# EAGLE board datalogger-v20 (EAGLE 7.7.0)
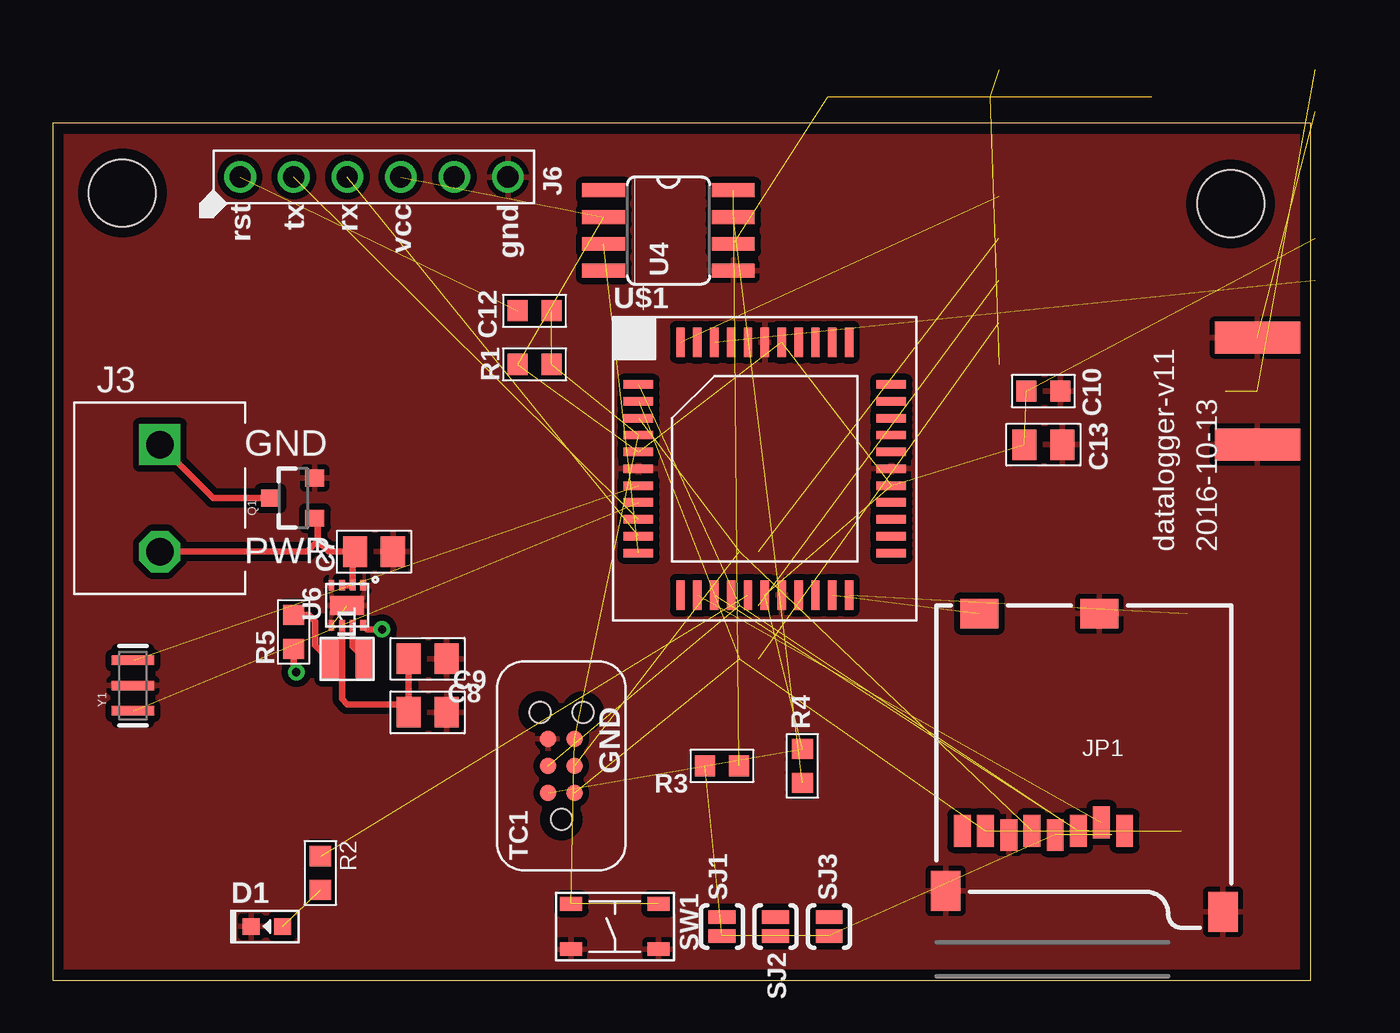
[diagram p0: board, top side]
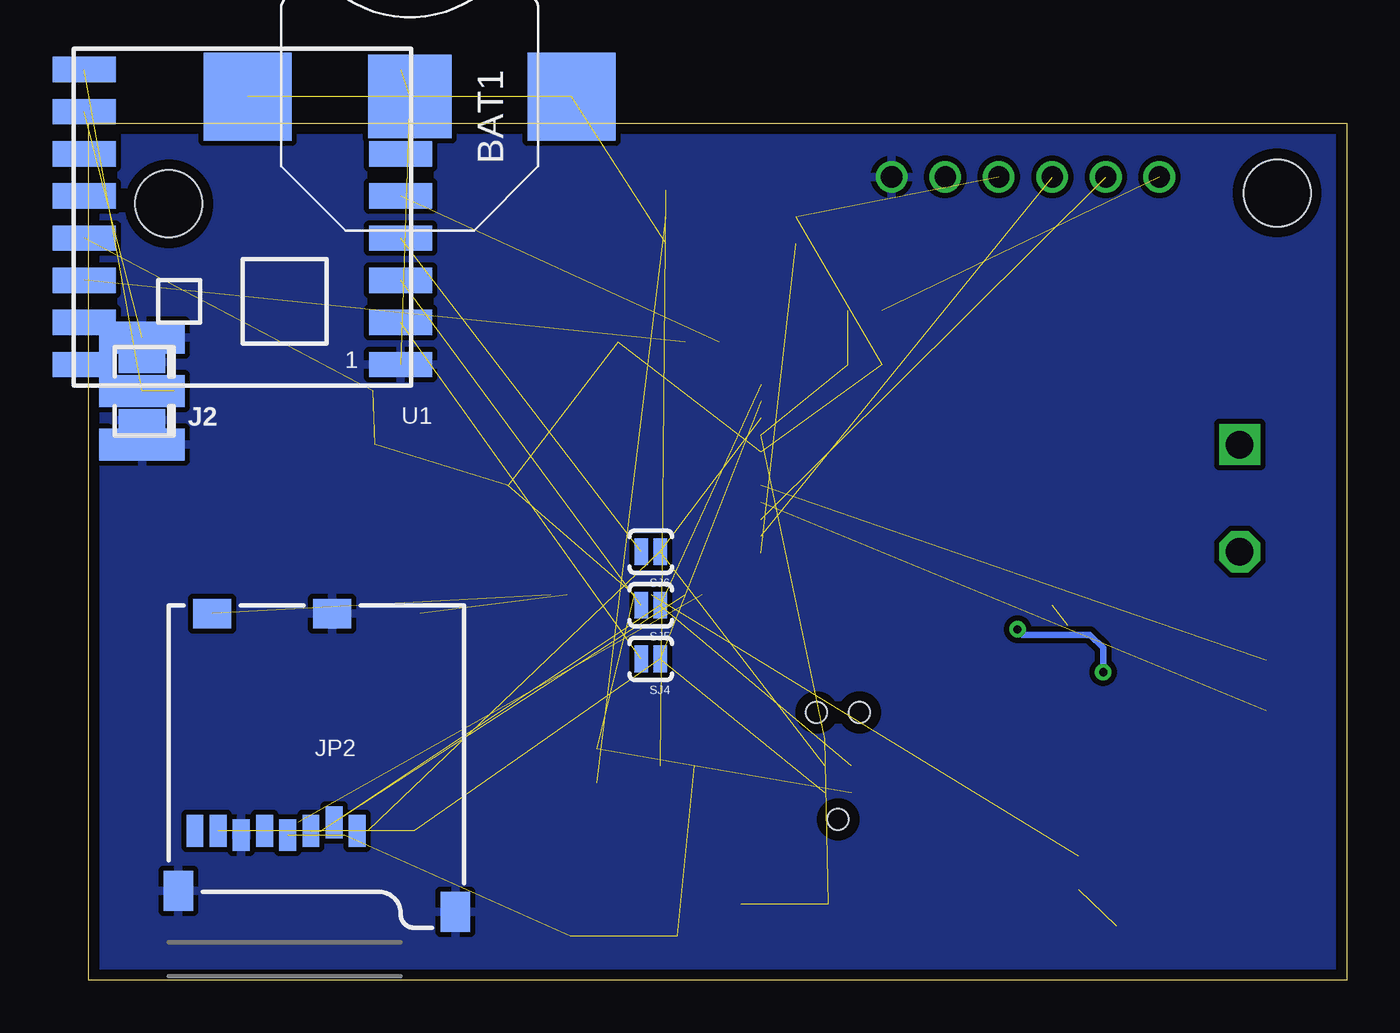
[diagram p1: board, bottom side, seen from below]

Size 59.69 x 40.64 mm. Coordinates in mm from the lower left corner, seen from the top.
Outline: 0,0 59.69,0 59.69,40.64 0,40.64 0,0
Copper layers (1*16): Top 0.0178mm / dielectric 59mil / Bottom 0.0178mm
Design rules "SSC-EAGLE-2Lyr_v1.0.0.3": minimum track width 6mil, minimum drill 14mil, track to track 6mil, track to pad 6mil, pad to pad 6mil, via to via 6mil, smd to smd 6mil, copper to edge 20mil, drill to drill 16mil, minimum pad ring 8mil, minimum via ring 8mil, stop-mask expansion 3mil, vias tented up to drill 0mil, thermal gap 10mil
Net classes: 1 power: width 0.381 mm, clearance 0.254 mm
Holes 3.17 mm at 3.3,37.34 55.88,36.83

## Footprints (pad centres in the part's own frame; a part is rotated, then mirrored left to right if it is on the bottom)
BAT_12MM = smd 3.962 x 3.962: GND 0,0 | smd 4.17 x 4.17: PWR@1 -7.685,0; PWR@2 7.685,0
C0805-N = smd 1.15 x 1.45: 1 -0.9,0; 2 0.9,0
C0603-N = smd 0.95 x 1: 1 -0.8,0; 2 0.8,0
LED0603 = smd 0.8 x 0.8: ANODE 0.75,0; CATHODE -0.75,0
ADAFRUIT_U.FL = smd 2.2 x 1.05: 1 0,1.375; 2 0,-1.375 | smd 0.8 x 1: 3 1.525,0
SCREW_TERM_2POS = drill 1.3 square: GND -2.54,0 | drill 1.3 octagon: PWR 2.54,0
SMA-EDGE = smd 1.524 x 4.064: GND@0 0,0; GND@1 5.08,0; SIG 2.54,0 | smd 1.524 x 4.064 bottom: GND@2 0,0; GND@3 5.08,0
PTH_2.54MM_01X06 = drill 1: P$1 -6.35,0; P$2 -3.81,0; P$3 -1.27,0; P$4 1.27,0; P$5 3.81,0; P$6 6.35,0
MICRO-SD-SOCKET-SDIO = smd 1.8 x 1.4: CD 11.92,0.4; GND2 6.22,0.4 | smd 0.8 x 1.5: CD/DAT3 6.13,10.3; CLK 9.43,10.7; CMD 7.23,10.7; DAT0 11.63,10.7; DAT1 12.73,10.7; DAT2 5.03,10.7; GND 10.53,10.9; VCC 8.33,10.9 | smd 1.4 x 1.9: GND1 0.37,14.55; GND3 13.52,13.55
L2520 = smd 0.85 x 2: P$1 -0.825,0; P$2 0.825,0
SOT23-3 = smd 0.8 x 0.9: 1 -0.95,-1; 2 0.95,-1; 3 0,1.1
R0603-N = smd 0.95 x 1: 1 -0.8,0; 2 0.8,0
PAD-JUMPER-2-NO_YES_SILK = smd 0.635 x 1.27: 1 -0.45,0; 2 0.45,0
TACT4.2MM = smd 1.05 x 0.65: P$1 -2.075,1.075; P$2 2.075,1.075; P$3 -2.075,-1.075; P$4 2.075,-1.075
TC2030-IDC-NL = smd 0.787 x 0.787: P$1 -1.27,-0.635; P$2 -1.27,0.635; P$3 0,-0.635; P$4 0,0.635; P$5 1.27,-0.635; P$6 1.27,0.635 | hole 0.991: 2.54,1.016; 2.54,-1.016; -2.54,0
RFM69HCW-XXXS2 = smd 3 x 1.2: 1 -7.5,7; 2 -7.5,5; 3 -7.5,3; 4 -7.5,1; 5 -7.5,-1; 6 -7.5,-3; 7 -7.5,-5; 8 -7.5,-7; 9 7.5,-7; 10 7.5,-5; 11 7.5,-3; 12 7.5,-1; 13 7.5,1; 14 7.5,3; 15 7.5,5; 16 7.5,7
SO08 = smd 0.66 x 2.032: 1 -1.905,-3.073; 2 -0.635,-3.073; 3 0.635,-3.073; 4 1.905,-3.073; 5 1.905,3.073; 6 0.635,3.073; 7 -0.635,3.073; 8 -1.905,3.073
WSON-8 = smd 0.28 x 0.5: 1 -0.75,-0.95; 2 -0.25,-0.95; 3 0.25,-0.95; 4 0.75,-0.95; 5 0.75,0.95; 6 0.25,0.95; 7 -0.25,0.95; 8 -0.75,0.95 | smd 1.6 x 0.9: P$9 0,0
TQFP44 = smd 1.4 x 0.4: 1 -6,4; 2 -6,3.2; 3 -6,2.4; 4 -6,1.6; 5 -6,0.8; 6 -6,0; 7 -6,-0.8; 8 -6,-1.6; 9 -6,-2.4; 10 -6,-3.2; 11 -6,-4; 23 6,-4; 24 6,-3.2; 25 6,-2.4; 26 6,-1.6; 27 6,-0.8; 28 6,0; 29 6,0.8; 30 6,1.6; 31 6,2.4; 32 6,3.2; 33 6,4 | smd 0.4 x 1.4: 12 -4,-6; 13 -3.2,-6; 14 -2.4,-6; 15 -1.6,-6; 16 -0.8,-6; 17 0,-6; 18 0.8,-6; 19 1.6,-6; 20 2.4,-6; 21 3.2,-6; 22 4,-6; 34 4,6; 35 3.2,6; 36 2.4,6; 37 1.6,6; 38 0.8,6; 39 0,6; 40 -0.8,6; 41 -1.6,6; 42 -2.4,6; 43 -3.2,6; 44 -4,6
RESONATOR-SMD = smd 0.45 x 2: 1 -1.2,0; 2 0,0; 3 1.2,0

## Placement (x,y rotation side)
BAT1  BATTERY_HOLDER12MM  [BAT_12MM]  44.45,41.91 0 bottom
C7  10uF  [C0805-N]  15.24,20.32 0 top
C8  10uF  [C0805-N]  17.78,15.24 0 top
C9  10uF  [C0805-N]  17.78,12.7 0 top
C10  10uF  [C0805-N]  46.99,25.4 0 top
C12  0.1uF  [C0603-N]  22.86,31.75 0 top
C13  0.1uF  [C0603-N]  46.99,27.94 0 top
D1  MF-LED-0603-RED  [LED0603]  10.16,2.54 0 top
FRAME1  FRAME-LETTERNO_PACKAGE  [DUMMY]  0,-1.27 0 top
FRAME3  FRAME-LETTERNO_PACKAGE  [DUMMY]  1.27,-1.27 0 top
J2  U.FL  [ADAFRUIT_U.FL]  57.15,27.94 0 bottom
J3  CON_01X02SCREW_0.2"  [SCREW_TERM_2POS]  5.08,22.86 270 top
J4  ANTENNA_SMA_EDGE  [SMA-EDGE]  57.15,30.48 270 bottom
J6  MF-CON-2.54mm-01x06  [PTH_2.54MM_01X06]  15.24,38.1 0 top
JP1  SD_USD-SOCKET  [MICRO-SD-SOCKET-SDIO]  55.88,17.78 180 top
JP2  SD_USD-SOCKET  [MICRO-SD-SOCKET-SDIO]  41.91,17.78 180 bottom
L1  2.2uH  [L2520]  13.97,15.24 180 top
Q1  mfet-n  [SOT23-3]  11.43,22.86 90 top
R1  10k  [R0603-N]  22.86,29.21 0 top
R2  680  [R0603-N]  12.7,5.08 270 top
R3  10k  [R0603-N]  31.75,10.16 180 top
R4  10k  [R0603-N]  35.56,10.16 90 top
R5  100k  [R0603-N]  11.43,16.51 90 top
SJ1  [PAD-JUMPER-2-NO_YES_SILK]  31.75,2.54 90 top
SJ2  [PAD-JUMPER-2-NO_YES_SILK]  34.29,2.54 90 top
SJ3  [PAD-JUMPER-2-NO_YES_SILK]  36.83,2.54 90 top
SJ4  [PAD-JUMPER-2-NO_YES_SILK]  33.02,15.24 180 bottom
SJ5  [PAD-JUMPER-2-NO_YES_SILK]  33.02,17.78 180 bottom
SJ6  [PAD-JUMPER-2-NO_YES_SILK]  33.02,20.32 180 bottom
SW1  MF-SW-TACT-4.2MM  [TACT4.2MM]  26.67,2.54 0 top
TC1  TC2030-IDC-NL  [TC2030-IDC-NL]  24.13,10.16 90 top
U1  RFM69HCW-433MHZ  [RFM69HCW-XXXS2]  52.39,36.2 180 bottom
U4  DS3231M  [SO08]  29.21,35.56 270 top
U6  TPS62162  [WSON-8]  13.97,17.78 180 top
U$1  ATMEGA1284P-SMD-AU  [TQFP44]  33.78,24.26 0 top
Y1  16MHZ  [RESONATOR-SMD]  3.81,13.97 90 top

## Library data of the parts
BAT1 = My_Connectors; PARTNO: BK-885-TR
C7-C10 = My_Passives; PARTNO: GRM21BR61C106KE15L
C12 C13 = My_Passives; PARTNO: CC0603KRX7R7BB104
D1 = My_LEDs; HOUSEPART: YES; MPN: MF-LED-0603-RED; POPULATE: 1; URL: https://factory.macrofab.com/part/MF-LED-0603-RED
FRAME1 FRAME3 = _my-parts; DESIGNER: Nobody; VERSION: v01
J2 = My_Connectors; PARTNO: U.FL-R-SMT-1(10)
J3 = My_Connectors; LABEL01: GND; LABEL02: PWR; PARTNO: 1729128
J4 = My_Connectors; PARTNO: EMPCB.SMAFSTJ.B.HT
J6 = My_Connectors; HOUSEPART: YES; LABEL01: rst; LABEL02: tx; LABEL03: rx; LABEL04: vcc; LABEL06: gnd; MPN: MF-CON-2.54mm-01x06; PARTNO: NA; POPULATE: 1; URL: https://factory.macrofab.com/part/MF-CON-2.54mm-01x06
JP1 JP2 = My_Connectors; PARTNO: 101-00660-68-6; PROD_ID: CONN-07820
L1 = My_Passives; PARTNO: VLS252012T-2R2M1R3
Q1 = My_Descrete_Semiconductors; PARTNO: SI2312BDS-T1-GE3
R1-R4 = My_Passives; PARTNO: RC0603FR-0710KL
R5 = My_Passives; PARTNO: RC0603FR-07100KL
SJ1-SJ6 = My_Passives; PARTNO: NA
SW1 = My_ElectroMechanical; HOUSEPART: YES; MPN: MF-SW-TACT-4.2MM; PARTNO: PTS810 SJM 250 SMTR LFS; POPULATE: 1; URL: https://factory.macrofab.com/part/MF-SW-TACT-4.2MM
TC1 = My_Connectors; HOUSEPART: NO; LABEL06: GND; MPN: TC2030-IDC-NL; PARTNO: NA; POPULATE: 0; URL: http://www.tag-connect.com/AVRISP
U1 = My_RF; PARTNO: COM-13910; PROD_ID: IC-11997, IC-12053
U4 = My_IC_Digital; PARTNO: DS3231MZ/V+
U6 = My_IC_Power; PARTNO: TPS62162DSGR
U$1 = My_IC_Digital
Y1 = My_xTal; PROD_ID: XTAL-08900

## Nets
3V3: C10.1 C13.1 J6.P$4 JP1.VCC JP2.VCC R1.1 R3.2 R4.2 SJ1.1 SJ2.1 SJ3.1 TC1.P$2 U1.13 U4.2 U$1.5 U$1.17 U$1.27 U$1.38
12V: C8.1 C9.1 L1.P$2 R5.2 U6.6
A4_SDA: R4.1 U4.7
A5_SCL: R3.1 U4.8
ANT: J2.3 J4.SIG U1.9
CARD_DETECT_0: JP1.CD U$1.21
CARD_DETECT_1: JP2.CD U$1.22
D6: SJ1.2
D7: SJ2.2
D8: SJ3.2
GND [power]: BAT1.GND C7.2 C8.2 C9.2 C10.2 C13.2 D1.CATHODE J2.1 J2.2 J4.GND@0 J4.GND@1 J4.GND@2 J4.GND@3 J6.P$6 JP1.GND JP1.GND1 JP1.GND2 JP1.GND3 JP2.GND JP2.GND1 JP2.GND2 JP2.GND3 Q1.2 SW1.P$3 SW1.P$4 TC1.P$6 U1.1 U1.8 U1.10 U4.5 U6.1 U6.4 U6.5 U6.P$9 U$1.6 U$1.18 U$1.28 U$1.39 Y1.2
INT0: U4.3 U$1.11
INT1: U$1.12
MISO: JP1.DAT0 JP2.DAT0 SJ4.1 TC1.P$1 U$1.2
MOSI: JP1.CMD JP2.CMD SJ5.1 TC1.P$4 U$1.1
N$1: J3.GND Q1.3
N$2: R2.1 U$1.16
N$3: U$1.7 Y1.3
N$4: C12.1 J6.P$1
N$5: U$1.8 Y1.1
N$6: L1.P$1 U6.7
N$7: SJ4.2 U1.2
N$8: D1.ANODE R2.2
N$9: SJ5.2 U1.3
N$10: BAT1.PWR@1 BAT1.PWR@2 U4.6
N$13: U$1.15
N$14: U$1.23
N$15: SJ6.2 U1.4
N$16: U$1.24
N$17: U$1.25
N$18: R5.1 U6.8
N$19: U$1.26
RF_CS: U1.5 U$1.44
RF_INT: U1.14 U$1.42
RST: C12.2 R1.2 SW1.P$1 SW1.P$2 TC1.P$5 U$1.4
RX0: J6.P$3 U$1.10
SCK: JP1.CLK JP2.CLK SJ6.1 TC1.P$3 U$1.3
SCL: U$1.19
SD0_CS: JP1.CD/DAT3 U$1.13
SD1_CS: JP2.CD/DAT3 U$1.14
SDA: U$1.20
TX0: J6.P$2 U$1.9
V_BAT: C7.1 J3.PWR Q1.1 U6.2 U6.3

## Tracks (layer width: path | path; a pad name or v marks a point on that pad's centre or on a via)
3V3  (17 unrouted)
12V
  Top 0.305: U6.6 13.72,15.81 | 13.72,15.81 L1.P$2 12.76,15.62 12.7,15.62 12.45,15.88 12.45,17.02 12.15,17.31 R5.2 | C8.1 C9.1 16.5,13.08 13.97,13.08 13.72,13.33 13.72,15.81
A4_SDA  (1 unrouted)
A5_SCL  (1 unrouted)
ANT  (2 unrouted)
CARD_DETECT_0  (1 unrouted)
CARD_DETECT_1  (1 unrouted)
GND  (4 unrouted)
  pour Bottom: 0,0 59.69,0 59.69,40.64 0,40.64
  pour Top (isolate 0.305, rank 6): 0,0 59.69,0 59.69,40.64 0,40.64
INT0  (1 unrouted)
MISO  (4 unrouted)
MOSI  (4 unrouted)
N$1
  Top 0.305: Q1.3 7.62,22.86 J3.GND
N$2  (1 unrouted)
N$3  (1 unrouted)
N$4  (1 unrouted)
N$5  (1 unrouted)
N$6
  Top 0.305: U6.7 14.22,15.81 L1.P$1
N$7  (1 unrouted)
N$8  (1 unrouted)
N$9  (1 unrouted)
N$10  (2 unrouted)
N$15  (1 unrouted)
N$18  (via drill 0.38)
  Top 0.305: R5.1 11.43,14.73 v11.56,14.61 | v15.62,16.64 14.91,16.64 U6.8
  Bottom 0.305: v11.56,14.61 11.56,15.75 12.19,16.38 15.37,16.38 v15.62,16.64
RF_CS  (1 unrouted)
RF_INT  (1 unrouted)
RST  (5 unrouted)
RX0  (1 unrouted)
SCK  (4 unrouted)
SD0_CS  (1 unrouted)
SD1_CS  (1 unrouted)
TX0  (1 unrouted)
V_BAT
  Top 0.305: 12.57,20.83 13.08,20.32 C7.1 14.22,20.2 U6.2 U6.3 | 12.57,20.83 12.57,21.77 Q1.1 | J3.PWR 12.06,20.32 12.57,20.83

## Text on the board
tNames: datalogger-v11 | 2016-10-13